# EAGLE board ledBlinker (EAGLE 8.2.2)
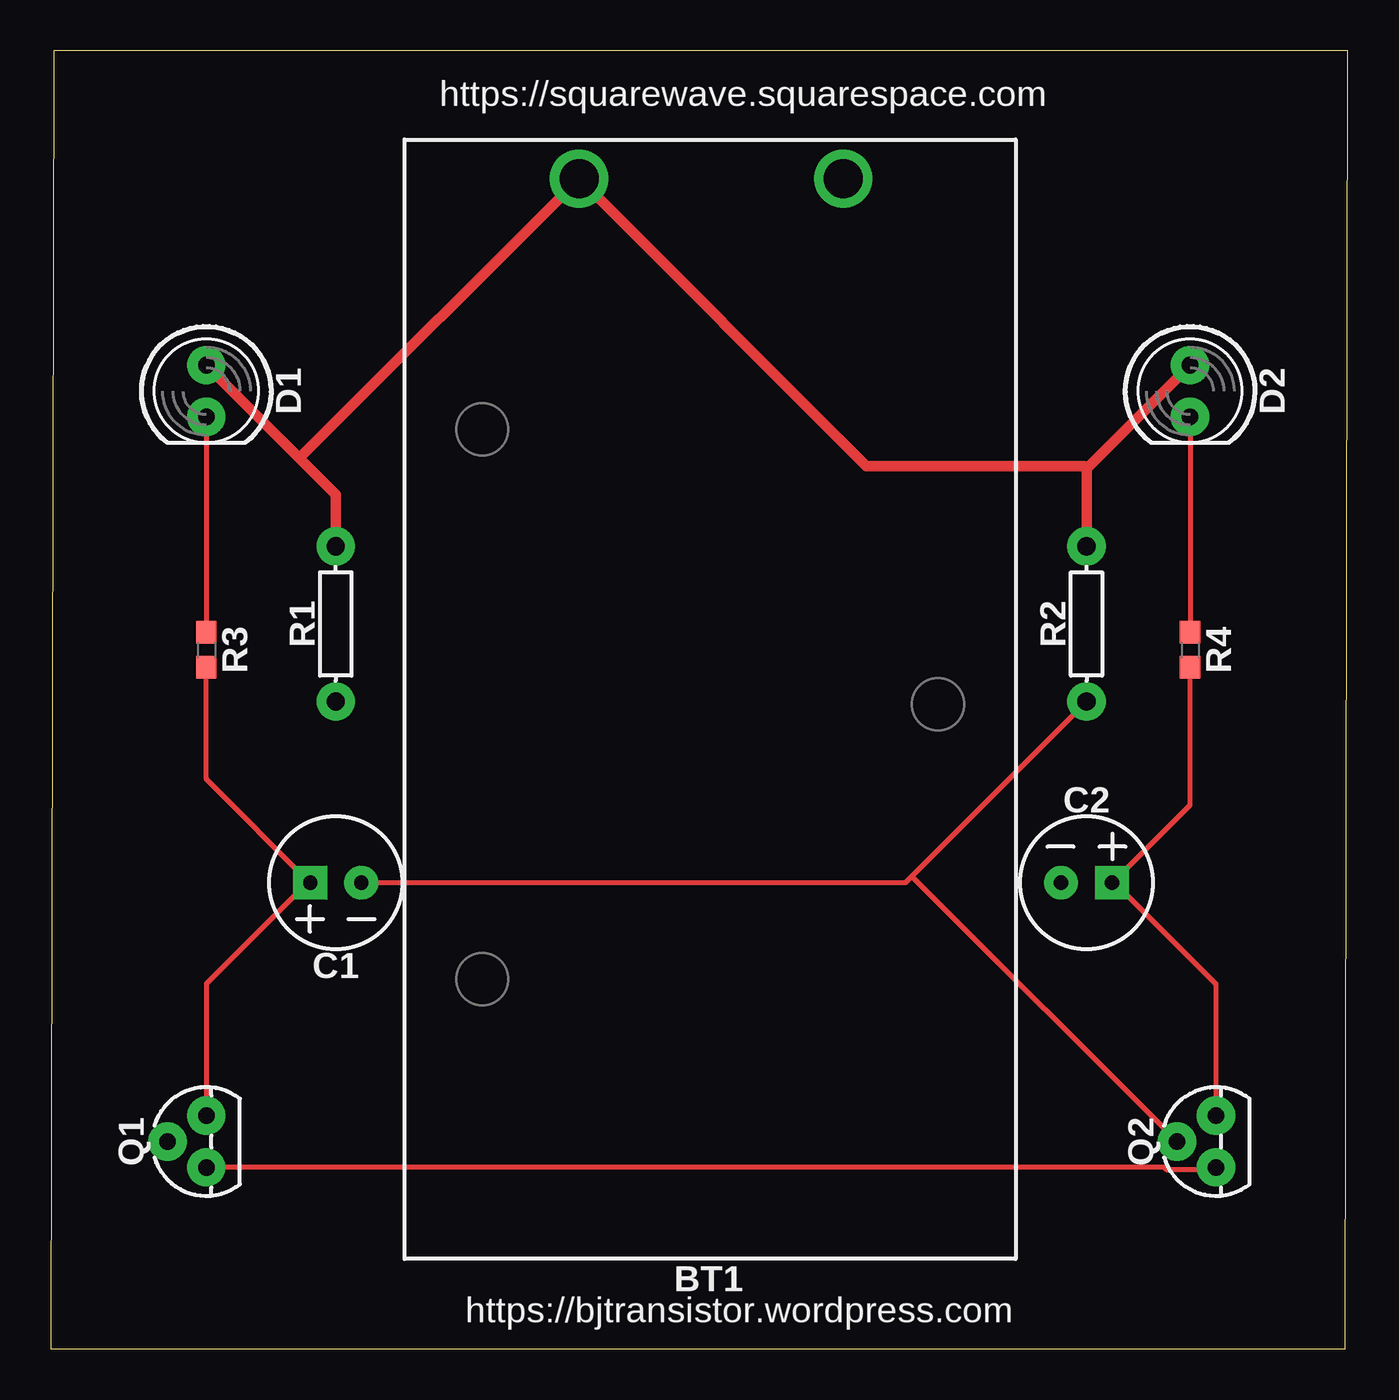
[diagram p0: board, top side]
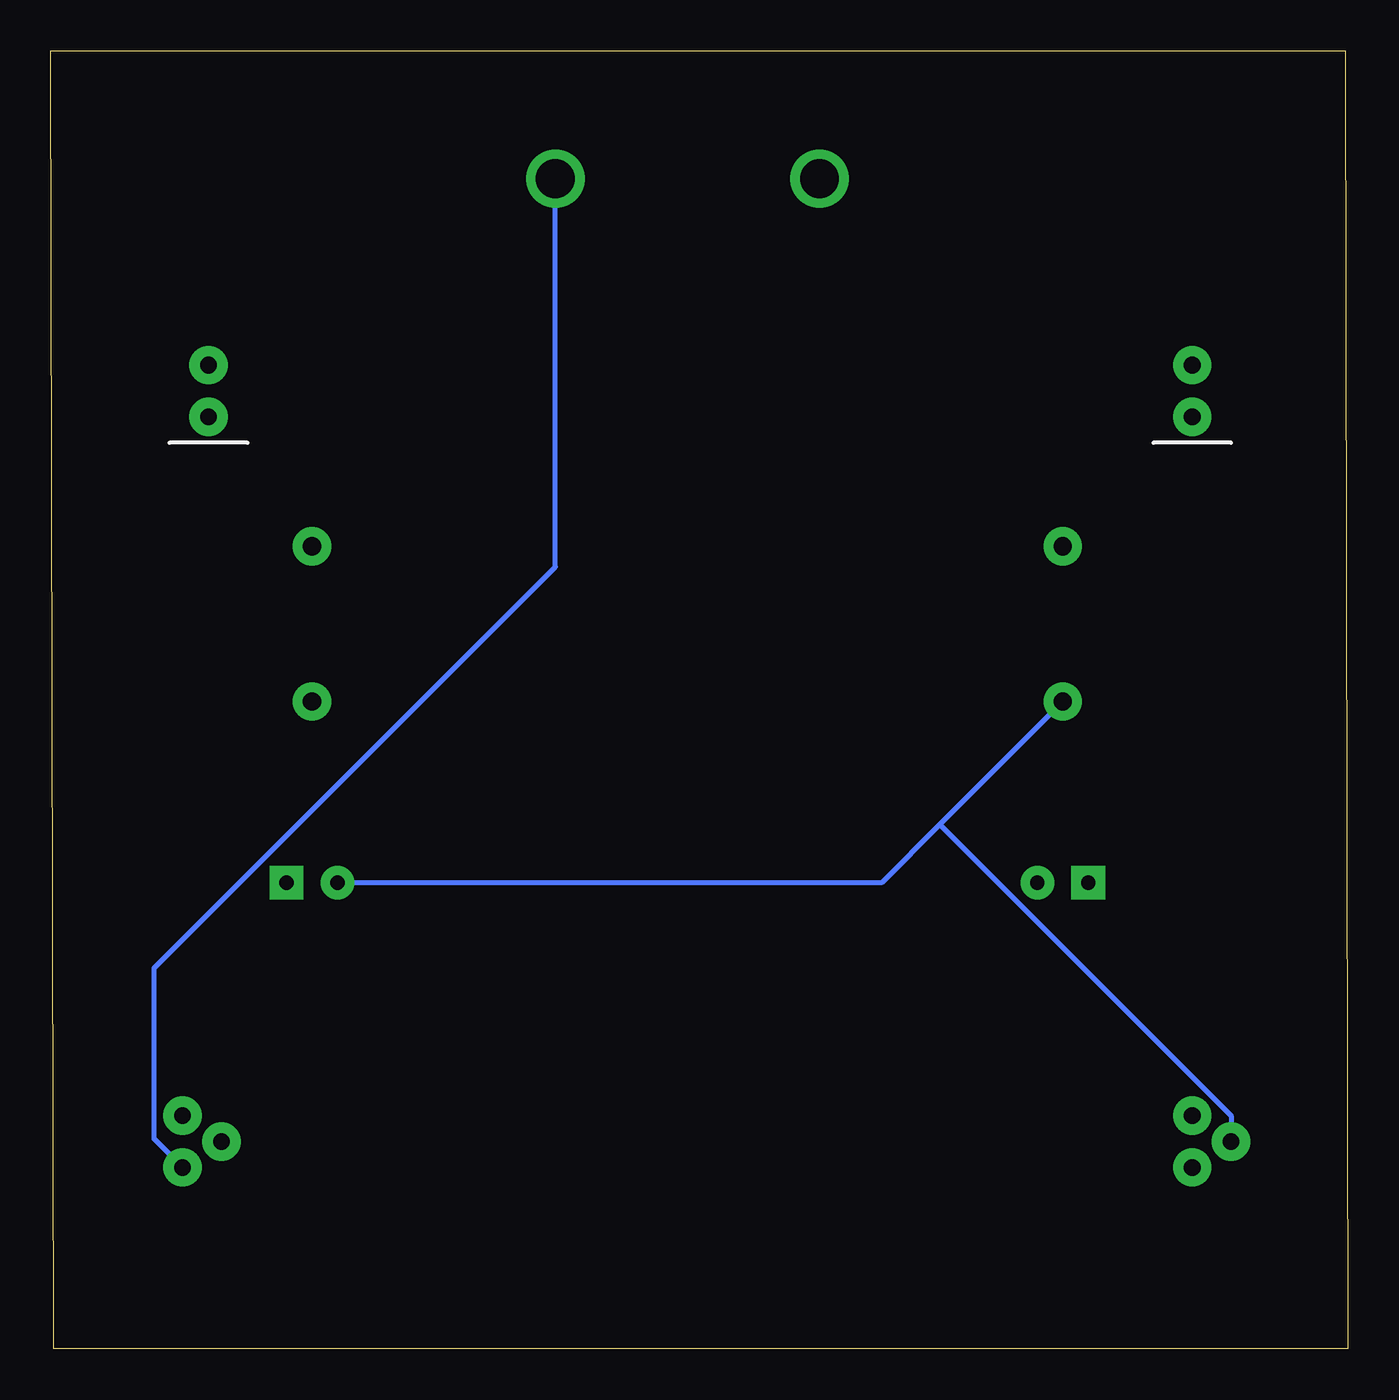
[diagram p1: board, bottom side, seen from below]

Size 63.61 x 63.68 mm. Coordinates in mm from the lower left corner, seen from the top.
Outline: 0,0 63.48,0 63.61,63.68 0.13,63.68 0,0
Copper layers (1*16): Top 0.035mm / dielectric 1.5mm / Bottom 0.035mm
Design rules "default": minimum track width 6mil, minimum drill 0.35mm, track to track 6mil, track to pad 6mil, pad to pad 6mil, via to via 6mil, smd to smd 6mil, copper to edge 40mil, drill to drill 6mil, minimum pad ring 10mil, minimum via ring 8mil, stop-mask expansion 4mil, vias tented up to drill 0mil, thermal gap 10mil
Net classes: 0 default: width 0.254 mm, clearance 0.254 mm; 1 supply: width 0.508 mm, clearance 0.508 mm

## Footprints (pad centres in the part's own frame; a part is rotated, then mirrored left to right if it is on the bottom)
BATTCON_9V = drill 1.905: + 0,0; - 0,-12.954
CPOL-RADIAL-2.5MM-6.5MM = drill 0.7 pad 1.651 square: 1 1.25,0 | drill 0.7 pad 1.651: 2 -1.25,0
LED_5MM = drill 0.813 pad 1.88: A -1.27,0; K 1.27,0
TO-92 = drill 0.813 pad 1.88: 1 -1.27,0; 2 0,1.905; 3 1.27,0
AXIAL-0.3 = drill 0.9 pad 1.88: P$1 -3.81,0; P$2 3.81,0
0603 = smd 1.1 x 1: 1 -0.85,0; 2 0.85,0

## Placement (x,y rotation side)
BT1  [BATTCON_9V]  25.91,57.4 90 top
C1  100uF  [CPOL-RADIAL-2.5MM-6.5MM]  13.97,22.86 180 top
C2  100uF  [CPOL-RADIAL-2.5MM-6.5MM]  50.8,22.86 0 top
D1  [LED_5MM]  7.62,46.99 270 top
D2  [LED_5MM]  55.88,46.99 270 top
Q1  200mA/40V  [TO-92]  7.62,10.16 90 top
Q2  200mA/40V  [TO-92]  57.15,10.16 90 top
R1  10k  [AXIAL-0.3]  13.97,35.56 90 top
R2  10k  [AXIAL-0.3]  50.8,35.56 90 top
R3  470  [0603]  7.62,34.29 270 top
R4  470  [0603]  55.88,34.29 270 top

## Library data of the parts
BT1 = SparkFun-Batteries; PROD_ID: BATT-10855
C1 C2 = SparkFun-Capacitors; PROD_ID: CAP-08439
D1 D2 = SparkFun-LED
Q1 Q2 = SparkFun-DiscreteSemi; PROD_ID: TRANS-08447
R1 R2 = SparkFun-Resistors; PROD_ID: RES-09435
R3 R4 = SparkFun-Resistors; PROD_ID: RES-07869

## Nets
GND: BT1.- Q1.1 Q2.1
N$1 [supply]: BT1.+ D1.A D2.A R1.P$2 R2.P$2
N$2: D1.K R3.1
N$3: D2.K R4.1
N$4: C2.2 Q1.2 R1.P$1
N$5: C1.2 Q2.2 R2.P$1
N$6: C1.1 Q1.3 R3.2
N$7: C2.1 Q2.3 R4.2

## Tracks (layer width: path | path; a pad name or v marks a point on that pad's centre or on a via)
GND
  Top 0.254: Q1.1 54.61,8.89 54.74,8.76 57.02,8.76 Q2.1
  Bottom 0.254: BT1.- 38.86,38.35 58.55,18.67 58.55,10.29 Q2.1
N$1
  Top 0.508: 50.8,43.18 R2.P$2 | D2.A 50.8,43.18 | 12.19,43.69 13.97,41.91 R1.P$2 | 12.19,43.69 D1.A | 12.19,43.69 BT1.+ 40.01,43.31 50.67,43.31 50.8,43.18
N$2
  Top 0.254: D1.K R3.1
N$3
  Top 0.254: D2.K R4.1
N$4
  Bottom 0.254: C2.2 22.86,22.86 20,25.72 | R1.P$1 20,25.72 | Q1.2 5.71,11.43 20,25.72
N$5
  Top 0.254: C1.2 41.91,22.86 42.23,23.18 | R2.P$1 42.23,23.18 | 42.23,23.18 Q2.2
N$6
  Top 0.254: R3.2 7.62,27.94 12.7,22.86 C1.1 12.57,22.86 7.62,17.91 Q1.3
N$7
  Top 0.254: R4.2 55.88,26.67 52.07,22.86 C2.1 52.2,22.86 57.15,17.91 Q2.3

## Text on the board
tPlace: https://squarewave.squarespace.com | https://bjtransistor.wordpress.com